# EAGLE board Q-FlexOLED-2 (EAGLE 7.7.0)
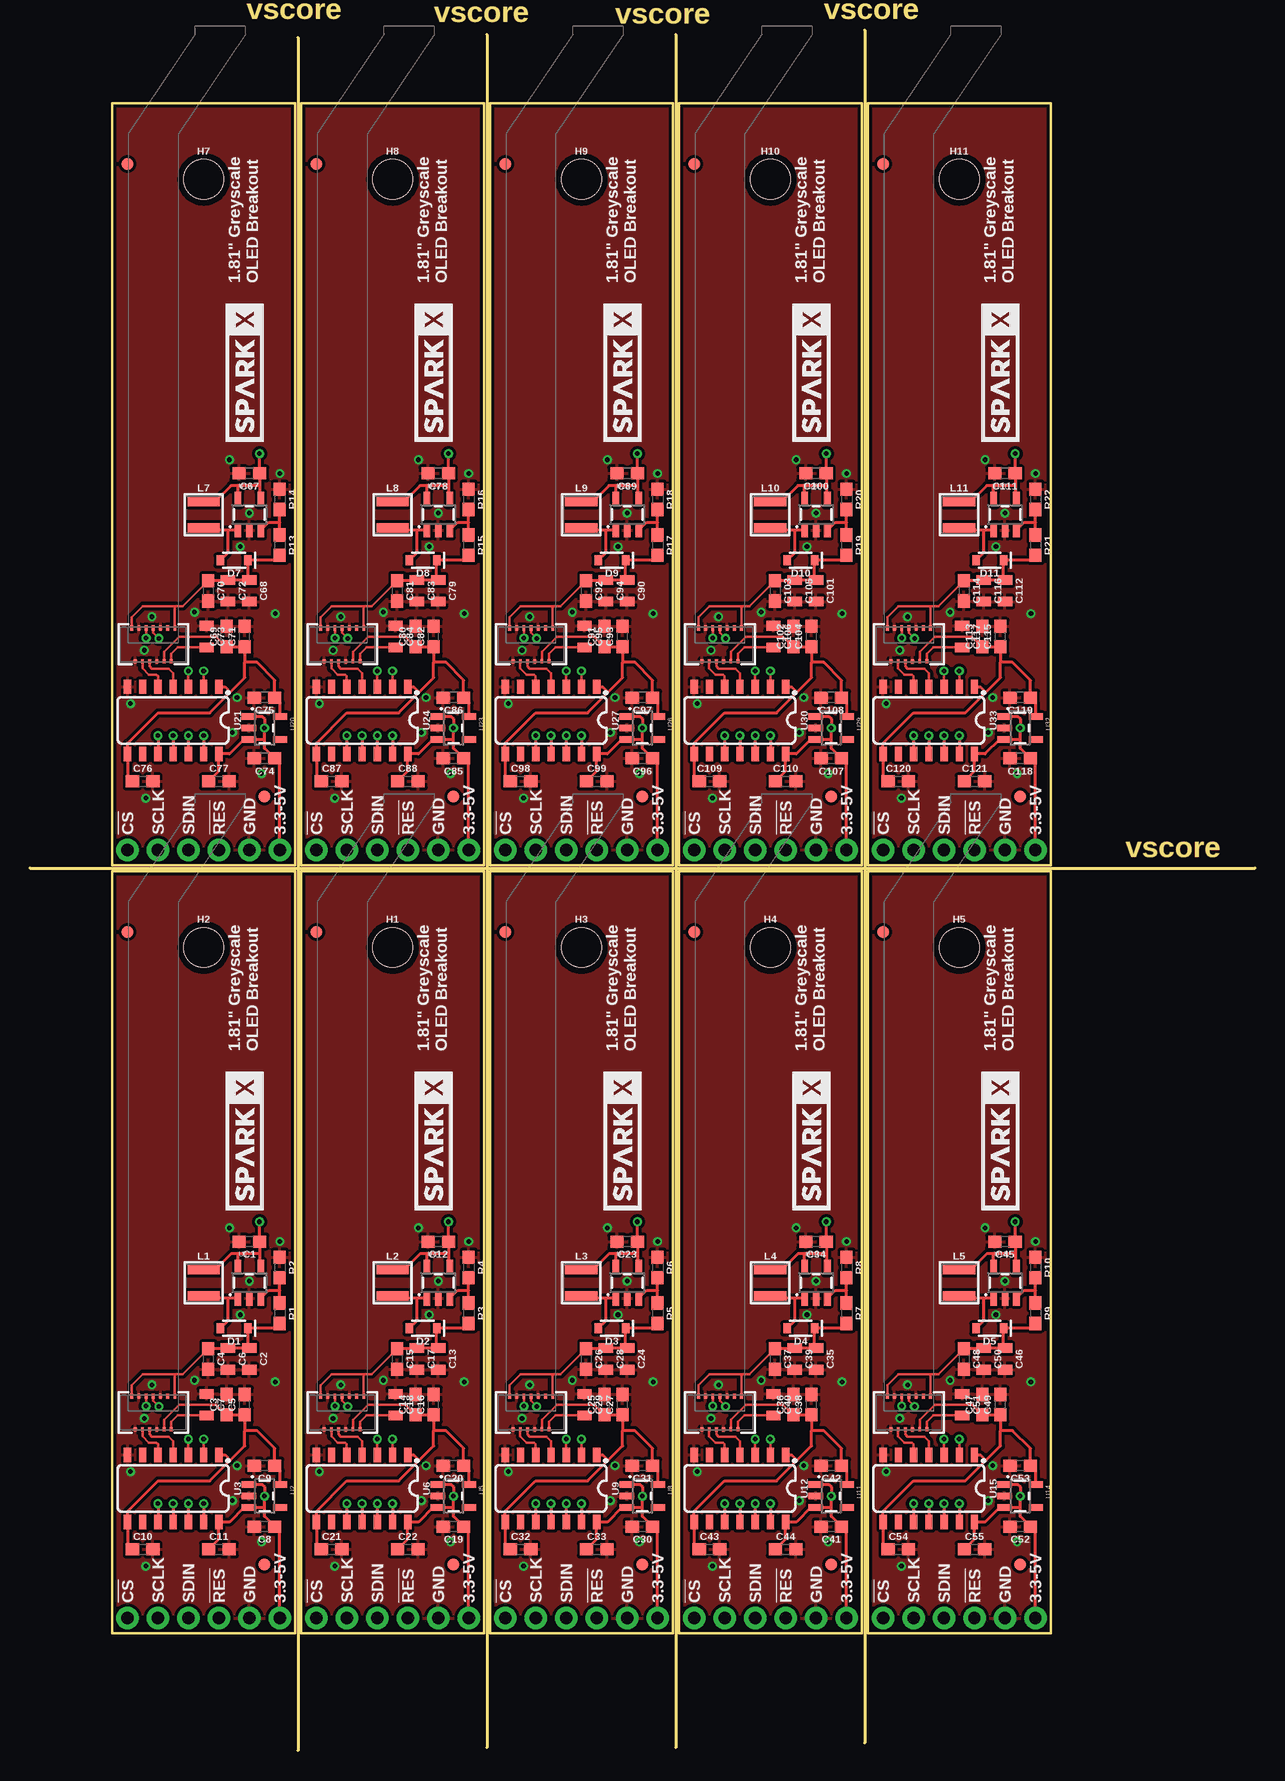
[diagram p0: board, top side]
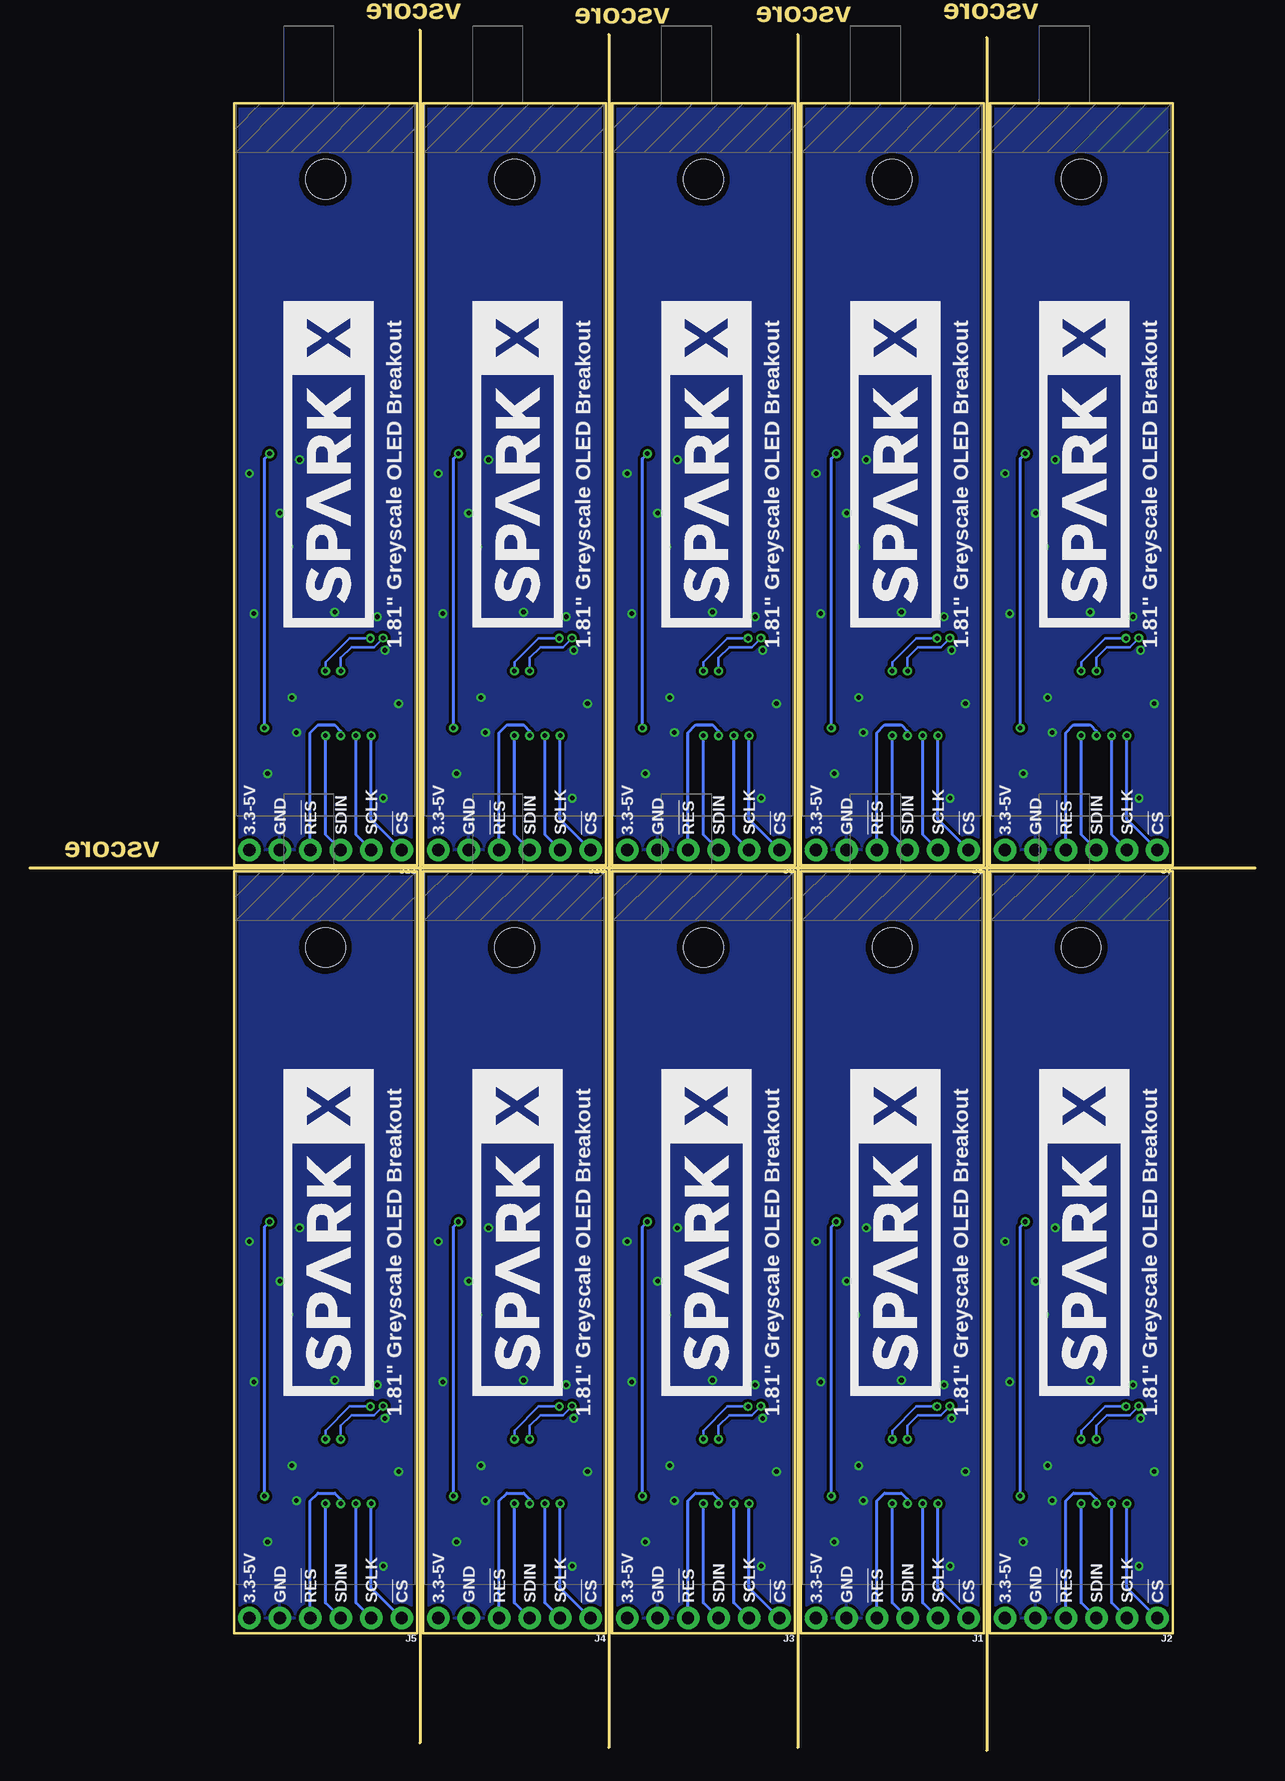
[diagram p1: board, bottom side, seen from below]

Size 102.11 x 143.38 mm. Coordinates in mm from the lower left corner, seen from the top.
Outline: 0,73.53 102.11,73.53
Outline: 22.35,142.75 22.35,0
Outline: 38.1,143 38.1,0.25
Outline: 53.85,143 53.85,0.25
Outline: 69.6,143.38 69.6,0.63
Outline: 22.1,9.78 6.86,9.78 6.86,73.28 22.1,73.27 22.1,9.78
Outline: 37.85,9.78 22.61,9.78 22.61,73.28 37.85,73.27 37.85,9.78
Outline: 53.59,9.78 38.35,9.78 38.35,73.28 53.59,73.27 53.59,9.78
Outline: 69.34,9.78 54.1,9.78 54.1,73.28 69.34,73.27 69.34,9.78
Outline: 85.09,9.78 69.85,9.78 69.85,73.28 85.09,73.27 85.09,9.78
Outline: 22.1,73.79 6.86,73.79 6.86,137.29 22.1,137.28 22.1,73.79
Outline: 37.85,73.79 22.61,73.79 22.61,137.29 37.85,137.28 37.85,73.79
Outline: 53.59,73.79 38.35,73.79 38.35,137.29 53.59,137.28 53.59,73.79
Outline: 69.34,73.79 54.1,73.79 54.1,137.29 69.34,137.28 69.34,73.79
Outline: 85.09,73.79 69.85,73.79 69.85,137.29 85.09,137.28 85.09,73.79
Copper layers (1*16): Top 0.035mm / dielectric 1.5mm / Bottom 0.035mm
Design rules "SparkFun-2-layer-TIGHT": minimum track width 7mil, minimum drill 15mil, track to track 7mil, track to pad 7mil, pad to pad 7mil, via to via 7mil, smd to smd 7mil, copper to edge 7mil, drill to drill 7mil, minimum pad ring 7mil, minimum via ring 7mil, stop-mask expansion 4mil, vias tented up to drill 25mil, thermal gap 10mil

## Footprints (pad centres in the part's own frame; a part is rotated, then mirrored left to right if it is on the bottom)
0603 = smd 1.1 x 1: 1 -0.85,0; 2 0.85,0
0805 = smd 0.8 x 1.2: 1 -0.9,0; 2 0.9,0
SOD-323 = smd 0.63 x 0.83: A 1.15,0; C -1.15,0
OEL_1.8_FPC_Y3B = smd 0.23 x 0.44 bottom: 1 6,-11.995; 3 5.4,-11.995; 5 4.8,-11.995; 7 4.2,-11.995; 9 3.6,-11.995; 11 3,-11.995; 13 2.4,-11.995 | smd 0.23 x 0.34 bottom: 2 5.7,-14.755; 4 5.1,-14.755; 6 4.5,-14.755; 8 3.9,-14.755; 10 3.3,-14.755; 12 2.7,-14.755
FIDUCIAL-1X2 = smd 1 x 1: 1 0,0
STAND-OFF = hole 3.302: 0,0
1X06_NO_SILK = drill 1.016 pad 1.88: 1 0,0; 2 2.54,0; 3 5.08,0; 4 7.62,0; 5 10.16,0; 6 12.7,0
INDUCTOR_3X3 = smd 2.7 x 0.8: P$1 0,1.1; P$2 0,-1.1
SOT23-5 = smd 0.55 x 1.2: 1 -0.95,-1.3; 2 0,-1.3; 3 0.95,-1.3; 4 0.95,1.3; 5 -0.95,1.3
SO14 = smd 0.6 x 1.2: 1 -3.81,-2.8; 2 -2.54,-2.8; 3 -1.27,-2.8; 4 0,-2.8; 5 1.27,-2.8; 6 2.54,-2.8; 7 3.81,-2.8; 8 3.81,2.8; 9 2.54,2.8; 10 1.27,2.8; 11 0,2.8; 12 -1.27,2.8; 13 -2.54,2.8; 14 -3.81,2.8

## Placement (x,y rotation side)
C1  1.0uF  [0603]  18.29,42.42 180 top
C2  1.0uF  [0805]  18.29,32.64 270 top
C3  0.1uF  [0603]  16.38,28.83 90 top
C4  0.1uF  [0603]  14.86,32.64 270 top
C5  1.0uF  [0603]  17.91,28.83 90 top
C6  2.2uF  [0805]  16.51,32.64 270 top
C7  2.2uF  [0805]  14.73,28.83 270 top
C8  1.0uF  [0603]  19.56,18.67 180 top
C9  2.2uF  [0603]  19.56,23.75 180 top
C10  0.1uF  [0603]  9.4,16.76 0 top
C11  0.1uF  [0603]  15.75,16.76 0 top
C12  1.0uF  [0603]  34.04,42.42 180 top
C13  1.0uF  [0805]  34.04,32.64 270 top
C14  0.1uF  [0603]  32.13,28.83 90 top
C15  0.1uF  [0603]  30.61,32.64 270 top
C16  1.0uF  [0603]  33.66,28.83 90 top
C17  2.2uF  [0805]  32.26,32.64 270 top
C18  2.2uF  [0805]  30.48,28.83 270 top
C19  1.0uF  [0603]  35.31,18.67 180 top
C20  2.2uF  [0603]  35.31,23.75 180 top
C21  0.1uF  [0603]  25.15,16.76 0 top
C22  0.1uF  [0603]  31.5,16.76 0 top
C23  1.0uF  [0603]  49.78,42.42 180 top
C24  1.0uF  [0805]  49.78,32.64 270 top
C25  0.1uF  [0603]  47.88,28.83 90 top
C26  0.1uF  [0603]  46.35,32.64 270 top
C27  1.0uF  [0603]  49.4,28.83 90 top
C28  2.2uF  [0805]  48.01,32.64 270 top
C29  2.2uF  [0805]  46.23,28.83 270 top
C30  1.0uF  [0603]  51.05,18.67 180 top
C31  2.2uF  [0603]  51.05,23.75 180 top
C32  0.1uF  [0603]  40.89,16.76 0 top
C33  0.1uF  [0603]  47.24,16.76 0 top
C34  1.0uF  [0603]  65.53,42.42 180 top
C35  1.0uF  [0805]  65.53,32.64 270 top
C36  0.1uF  [0603]  63.63,28.83 90 top
C37  0.1uF  [0603]  62.1,32.64 270 top
C38  1.0uF  [0603]  65.15,28.83 90 top
C39  2.2uF  [0805]  63.75,32.64 270 top
C40  2.2uF  [0805]  61.98,28.83 270 top
C41  1.0uF  [0603]  66.8,18.67 180 top
C42  2.2uF  [0603]  66.8,23.75 180 top
C43  0.1uF  [0603]  56.64,16.76 0 top
C44  0.1uF  [0603]  62.99,16.76 0 top
C45  1.0uF  [0603]  81.28,42.42 180 top
C46  1.0uF  [0805]  81.28,32.64 270 top
C47  0.1uF  [0603]  79.38,28.83 90 top
C48  0.1uF  [0603]  77.85,32.64 270 top
C49  1.0uF  [0603]  80.9,28.83 90 top
C50  2.2uF  [0805]  79.5,32.64 270 top
C51  2.2uF  [0805]  77.72,28.83 270 top
C52  1.0uF  [0603]  82.55,18.67 180 top
C53  2.2uF  [0603]  82.55,23.75 180 top
C54  0.1uF  [0603]  72.39,16.76 0 top
C55  0.1uF  [0603]  78.74,16.76 0 top
C67  1.0uF  [0603]  18.29,106.43 180 top
C68  1.0uF  [0805]  18.29,96.65 270 top
C69  0.1uF  [0603]  16.38,92.84 90 top
C70  0.1uF  [0603]  14.86,96.65 270 top
C71  1.0uF  [0603]  17.91,92.84 90 top
C72  2.2uF  [0805]  16.51,96.65 270 top
C73  2.2uF  [0805]  14.73,92.84 270 top
C74  1.0uF  [0603]  19.56,82.68 180 top
C75  2.2uF  [0603]  19.56,87.76 180 top
C76  0.1uF  [0603]  9.4,80.77 0 top
C77  0.1uF  [0603]  15.75,80.77 0 top
C78  1.0uF  [0603]  34.04,106.43 180 top
C79  1.0uF  [0805]  34.04,96.65 270 top
C80  0.1uF  [0603]  32.13,92.84 90 top
C81  0.1uF  [0603]  30.61,96.65 270 top
C82  1.0uF  [0603]  33.66,92.84 90 top
C83  2.2uF  [0805]  32.26,96.65 270 top
C84  2.2uF  [0805]  30.48,92.84 270 top
C85  1.0uF  [0603]  35.31,82.68 180 top
C86  2.2uF  [0603]  35.31,87.76 180 top
C87  0.1uF  [0603]  25.15,80.77 0 top
C88  0.1uF  [0603]  31.5,80.77 0 top
C89  1.0uF  [0603]  49.78,106.43 180 top
C90  1.0uF  [0805]  49.78,96.65 270 top
C91  0.1uF  [0603]  47.88,92.84 90 top
C92  0.1uF  [0603]  46.35,96.65 270 top
C93  1.0uF  [0603]  49.4,92.84 90 top
C94  2.2uF  [0805]  48.01,96.65 270 top
C95  2.2uF  [0805]  46.23,92.84 270 top
C96  1.0uF  [0603]  51.05,82.68 180 top
C97  2.2uF  [0603]  51.05,87.76 180 top
C98  0.1uF  [0603]  40.89,80.77 0 top
C99  0.1uF  [0603]  47.24,80.77 0 top
C100  1.0uF  [0603]  65.53,106.43 180 top
C101  1.0uF  [0805]  65.53,96.65 270 top
C102  0.1uF  [0603]  63.63,92.84 90 top
C103  0.1uF  [0603]  62.1,96.65 270 top
C104  1.0uF  [0603]  65.15,92.84 90 top
C105  2.2uF  [0805]  63.75,96.65 270 top
C106  2.2uF  [0805]  61.98,92.84 270 top
C107  1.0uF  [0603]  66.8,82.68 180 top
C108  2.2uF  [0603]  66.8,87.76 180 top
C109  0.1uF  [0603]  56.64,80.77 0 top
C110  0.1uF  [0603]  62.99,80.77 0 top
C111  1.0uF  [0603]  81.28,106.43 180 top
C112  1.0uF  [0805]  81.28,96.65 270 top
C113  0.1uF  [0603]  79.38,92.84 90 top
C114  0.1uF  [0603]  77.85,96.65 270 top
C115  1.0uF  [0603]  80.9,92.84 90 top
C116  2.2uF  [0805]  79.5,96.65 270 top
C117  2.2uF  [0805]  77.72,92.84 270 top
C118  1.0uF  [0603]  82.55,82.68 180 top
C119  2.2uF  [0603]  82.55,87.76 180 top
C120  0.1uF  [0603]  72.39,80.77 0 top
C121  0.1uF  [0603]  78.74,80.77 0 top
D1  1A/23V/620mV  [SOD-323]  17.02,35.18 180 top
D2  1A/23V/620mV  [SOD-323]  32.77,35.18 180 top
D3  1A/23V/620mV  [SOD-323]  48.51,35.18 180 top
D4  1A/23V/620mV  [SOD-323]  64.26,35.18 180 top
D5  1A/23V/620mV  [SOD-323]  80.01,35.18 180 top
D7  1A/23V/620mV  [SOD-323]  17.02,99.19 180 top
D8  1A/23V/620mV  [SOD-323]  32.77,99.19 180 top
D9  1A/23V/620mV  [SOD-323]  48.51,99.19 180 top
D10  1A/23V/620mV  [SOD-323]  64.26,99.19 180 top
D11  1A/23V/620mV  [SOD-323]  80.01,99.19 180 top
DS1  OEL_1.8OEL_Y3B  [OEL_1.8_FPC_Y3B]  14.48,41.53 0 bottom
DS2  OEL_1.8OEL_Y3B  [OEL_1.8_FPC_Y3B]  30.23,41.53 0 bottom
DS3  OEL_1.8OEL_Y3B  [OEL_1.8_FPC_Y3B]  45.97,41.53 0 bottom
DS4  OEL_1.8OEL_Y3B  [OEL_1.8_FPC_Y3B]  61.72,41.53 0 bottom
DS5  OEL_1.8OEL_Y3B  [OEL_1.8_FPC_Y3B]  77.47,41.53 0 bottom
DS7  OEL_1.8OEL_Y3B  [OEL_1.8_FPC_Y3B]  14.48,105.54 0 bottom
DS8  OEL_1.8OEL_Y3B  [OEL_1.8_FPC_Y3B]  30.23,105.54 0 bottom
DS9  OEL_1.8OEL_Y3B  [OEL_1.8_FPC_Y3B]  45.97,105.54 0 bottom
DS10  OEL_1.8OEL_Y3B  [OEL_1.8_FPC_Y3B]  61.72,105.54 0 bottom
DS11  OEL_1.8OEL_Y3B  [OEL_1.8_FPC_Y3B]  77.47,105.54 0 bottom
FD1  FIDUCIAL1X2  [FIDUCIAL-1X2]  19.56,15.49 0 top
FD2  FIDUCIAL1X2  [FIDUCIAL-1X2]  8.13,68.2 0 top
FD3  FIDUCIAL1X2  [FIDUCIAL-1X2]  35.31,15.49 0 top
FD4  FIDUCIAL1X2  [FIDUCIAL-1X2]  23.88,68.2 0 top
FD5  FIDUCIAL1X2  [FIDUCIAL-1X2]  51.05,15.49 0 top
FD6  FIDUCIAL1X2  [FIDUCIAL-1X2]  39.62,68.2 0 top
FD7  FIDUCIAL1X2  [FIDUCIAL-1X2]  66.8,15.49 0 top
FD8  FIDUCIAL1X2  [FIDUCIAL-1X2]  55.37,68.2 0 top
FD9  FIDUCIAL1X2  [FIDUCIAL-1X2]  82.55,15.49 0 top
FD10  FIDUCIAL1X2  [FIDUCIAL-1X2]  71.12,68.2 0 top
FD13  FIDUCIAL1X2  [FIDUCIAL-1X2]  19.56,79.5 0 top
FD14  FIDUCIAL1X2  [FIDUCIAL-1X2]  8.13,132.21 0 top
FD15  FIDUCIAL1X2  [FIDUCIAL-1X2]  35.31,79.5 0 top
FD16  FIDUCIAL1X2  [FIDUCIAL-1X2]  23.88,132.21 0 top
FD17  FIDUCIAL1X2  [FIDUCIAL-1X2]  51.05,79.5 0 top
FD18  FIDUCIAL1X2  [FIDUCIAL-1X2]  39.62,132.21 0 top
FD19  FIDUCIAL1X2  [FIDUCIAL-1X2]  66.8,79.5 0 top
FD20  FIDUCIAL1X2  [FIDUCIAL-1X2]  55.37,132.21 0 top
FD21  FIDUCIAL1X2  [FIDUCIAL-1X2]  82.55,79.5 0 top
FD22  FIDUCIAL1X2  [FIDUCIAL-1X2]  71.12,132.21 0 top
H1  STAND-OFF  [STAND-OFF]  30.23,66.93 0 top
H2  STAND-OFF  [STAND-OFF]  14.48,66.93 0 top
H3  STAND-OFF  [STAND-OFF]  45.97,66.93 0 top
H4  STAND-OFF  [STAND-OFF]  61.72,66.93 0 top
H5  STAND-OFF  [STAND-OFF]  77.47,66.93 0 top
H7  STAND-OFF  [STAND-OFF]  14.48,130.94 0 top
H8  STAND-OFF  [STAND-OFF]  30.23,130.94 0 top
H9  STAND-OFF  [STAND-OFF]  45.97,130.94 0 top
H10  STAND-OFF  [STAND-OFF]  61.72,130.94 0 top
H11  STAND-OFF  [STAND-OFF]  77.47,130.94 0 top
J1  [1X06_NO_SILK]  23.88,11.05 180 bottom
J2  [1X06_NO_SILK]  8.13,11.05 180 bottom
J3  [1X06_NO_SILK]  39.62,11.05 180 bottom
J4  [1X06_NO_SILK]  55.37,11.05 180 bottom
J5  [1X06_NO_SILK]  71.12,11.05 180 bottom
J7  [1X06_NO_SILK]  8.13,75.06 180 bottom
J8  [1X06_NO_SILK]  23.88,75.06 180 bottom
J9  [1X06_NO_SILK]  39.62,75.06 180 bottom
J10  [1X06_NO_SILK]  55.37,75.06 180 bottom
J11  [1X06_NO_SILK]  71.12,75.06 180 bottom
L1  10uH  [INDUCTOR_3X3]  14.48,38.99 0 top
L2  10uH  [INDUCTOR_3X3]  30.23,38.99 0 top
L3  10uH  [INDUCTOR_3X3]  45.97,38.99 0 top
L4  10uH  [INDUCTOR_3X3]  61.72,38.99 0 top
L5  10uH  [INDUCTOR_3X3]  77.47,38.99 0 top
L7  10uH  [INDUCTOR_3X3]  14.48,103 0 top
L8  10uH  [INDUCTOR_3X3]  30.23,103 0 top
L9  10uH  [INDUCTOR_3X3]  45.97,103 0 top
L10  10uH  [INDUCTOR_3X3]  61.72,103 0 top
L11  10uH  [INDUCTOR_3X3]  77.47,103 0 top
LOGO1  SPARKX-LOGO5  [SPARKX-LARGE]  17.91,50.8 90 top
LOGO2  SPARKX-LOGO5  [SPARKX-XLARGE]  14.22,43.18 90 bottom
LOGO3  SPARKX-LOGO5  [SPARKX-LARGE]  33.66,50.8 90 top
LOGO4  SPARKX-LOGO5  [SPARKX-XLARGE]  29.97,43.18 90 bottom
LOGO5  SPARKX-LOGO5  [SPARKX-LARGE]  49.4,50.8 90 top
LOGO6  SPARKX-LOGO5  [SPARKX-XLARGE]  45.72,43.18 90 bottom
LOGO7  SPARKX-LOGO5  [SPARKX-LARGE]  65.15,50.8 90 top
LOGO8  SPARKX-LOGO5  [SPARKX-XLARGE]  61.47,43.18 90 bottom
LOGO9  SPARKX-LOGO5  [SPARKX-LARGE]  80.9,50.8 90 top
LOGO10  SPARKX-LOGO5  [SPARKX-XLARGE]  77.22,43.18 90 bottom
LOGO13  SPARKX-LOGO5  [SPARKX-LARGE]  17.91,114.81 90 top
LOGO14  SPARKX-LOGO5  [SPARKX-XLARGE]  14.22,107.19 90 bottom
LOGO15  SPARKX-LOGO5  [SPARKX-LARGE]  33.66,114.81 90 top
LOGO16  SPARKX-LOGO5  [SPARKX-XLARGE]  29.97,107.19 90 bottom
LOGO17  SPARKX-LOGO5  [SPARKX-LARGE]  49.4,114.81 90 top
LOGO18  SPARKX-LOGO5  [SPARKX-XLARGE]  45.72,107.19 90 bottom
LOGO19  SPARKX-LOGO5  [SPARKX-LARGE]  65.15,114.81 90 top
LOGO20  SPARKX-LOGO5  [SPARKX-XLARGE]  61.47,107.19 90 bottom
LOGO21  SPARKX-LOGO5  [SPARKX-LARGE]  80.9,114.81 90 top
LOGO22  SPARKX-LOGO5  [SPARKX-XLARGE]  77.22,107.19 90 bottom
R1  47k  [0603]  20.83,36.45 270 top
R2  5.6k  [0603]  20.83,40.26 270 top
R3  47k  [0603]  36.58,36.45 270 top
R4  5.6k  [0603]  36.58,40.26 270 top
R5  47k  [0603]  52.32,36.45 270 top
R6  5.6k  [0603]  52.32,40.26 270 top
R7  47k  [0603]  68.07,36.45 270 top
R8  5.6k  [0603]  68.07,40.26 270 top
R9  47k  [0603]  83.82,36.45 270 top
R10  5.6k  [0603]  83.82,40.26 270 top
R13  47k  [0603]  20.83,100.46 270 top
R14  5.6k  [0603]  20.83,104.27 270 top
R15  47k  [0603]  36.58,100.46 270 top
R16  5.6k  [0603]  36.58,104.27 270 top
R17  47k  [0603]  52.32,100.46 270 top
R18  5.6k  [0603]  52.32,104.27 270 top
R19  47k  [0603]  68.07,100.46 270 top
R20  5.6k  [0603]  68.07,104.27 270 top
R21  47k  [0603]  83.82,100.46 270 top
R22  5.6k  [0603]  83.82,104.27 270 top
U1  AP3012  [SOT23-5]  18.29,38.99 0 top
U2  3.3V  [SOT23-5]  19.56,21.21 270 top
U3  TXB0104  [SO14]  11.94,21.84 180 top
U4  AP3012  [SOT23-5]  34.04,38.99 0 top
U5  3.3V  [SOT23-5]  35.31,21.21 270 top
U6  TXB0104  [SO14]  27.69,21.84 180 top
U7  AP3012  [SOT23-5]  49.78,38.99 0 top
U8  3.3V  [SOT23-5]  51.05,21.21 270 top
U9  TXB0104  [SO14]  43.43,21.84 180 top
U10  AP3012  [SOT23-5]  65.53,38.99 0 top
U11  3.3V  [SOT23-5]  66.8,21.21 270 top
U12  TXB0104  [SO14]  59.18,21.84 180 top
U13  AP3012  [SOT23-5]  81.28,38.99 0 top
U14  3.3V  [SOT23-5]  82.55,21.21 270 top
U15  TXB0104  [SO14]  74.93,21.84 180 top
U19  AP3012  [SOT23-5]  18.29,103 0 top
U20  3.3V  [SOT23-5]  19.56,85.22 270 top
U21  TXB0104  [SO14]  11.94,85.85 180 top
U22  AP3012  [SOT23-5]  34.04,103 0 top
U23  3.3V  [SOT23-5]  35.31,85.22 270 top
U24  TXB0104  [SO14]  27.69,85.85 180 top
U25  AP3012  [SOT23-5]  49.78,103 0 top
U26  3.3V  [SOT23-5]  51.05,85.22 270 top
U27  TXB0104  [SO14]  43.43,85.85 180 top
U28  AP3012  [SOT23-5]  65.53,103 0 top
U29  3.3V  [SOT23-5]  66.8,85.22 270 top
U30  TXB0104  [SO14]  59.18,85.85 180 top
U31  AP3012  [SOT23-5]  81.28,103 0 top
U32  3.3V  [SOT23-5]  82.55,85.22 270 top
U33  TXB0104  [SO14]  74.93,85.85 180 top

## Library data of the parts
C1 C5 C8 C12 C16 C19 C23 C27 C30 C34 C38 C41 C45 C49 C52 C67 C71 C74 C78 C82 C85 C89 C93 C96 C100 C104 C107 C111 C115 C118 = SparkFun-Capacitors; PROD_ID: CAP-00868
C2 C13 C24 C35 C46 C68 C79 C90 C101 C112 = SparkFun-Capacitors; PROD_ID: CAP-11625
C3 C4 C10 C11 C14 C15 C21 C22 C25 C26 C32 C33 C36 C37 C43 C44 C47 C48 C54 C55 C69 C70 C76 C77 C80 C81 C87 C88 C91 C92 C98 C99 C102 C103 C109 C110 C113 C114 C120 C121 = SparkFun-Capacitors; PROD_ID: CAP-00810
C6 C7 C17 C18 C28 C29 C39 C40 C50 C51 C72 C73 C83 C84 C94 C95 C105 C106 C116 C117 = SparkFun-Capacitors; PROD_ID: CAP-11624
C9 C20 C31 C42 C53 C75 C86 C97 C108 C119 = SparkFun-Capacitors; PROD_ID: CAP-07888
D1-D5 D7-D11 = SparkFun-DiscreteSemi; PROD_ID: DIO-11623
DS1-DS5 DS7-DS11 L1-L5 L7-L11 LOGO1-LOGO10 LOGO13-LOGO22 U1 U4 U7 U10 U13 U19 U22 U25 U28 U31 = 1.81_Greyscale_OLED_Breakout
FD1-FD10 FD13-FD22 = SparkFun-Aesthetics
H1-H5 H7-H11 = SparkFun-Hardware
J1-J5 J7-J11 = SparkFun-Connectors
R1 R3 R5 R7 R9 R13 R15 R17 R19 R21 = SparkFun-Resistors; PROD_ID: RES-07871
R2 R4 R6 R8 R10 R14 R16 R18 R20 R22 = SparkFun-Resistors; PROD_ID: RES-12378
U2 U5 U8 U11 U14 U20 U23 U26 U29 U32 = SparkFun-IC-Power; PROD_ID: VREG-12457
U3 U6 U9 U12 U15 U21 U24 U27 U30 U33 = SparkFun-IC-Comms; PROD_ID: IC-11329

## Nets
3.3V: C3.1 C5.1 C9.1 C10.1 DS1.10 U2.5 U3.1 U3.8
3.3V1: C14.1 C16.1 C20.1 C21.1 DS2.10 U5.5 U6.1 U6.8
3.3V2: C25.1 C27.1 C31.1 C32.1 DS3.10 U8.5 U9.1 U9.8
3.3V3: C36.1 C38.1 C42.1 C43.1 DS4.10 U11.5 U12.1 U12.8
3.3V4: C47.1 C49.1 C53.1 C54.1 DS5.10 U14.5 U15.1 U15.8
3.3V6: C69.1 C71.1 C75.1 C76.1 DS7.10 U20.5 U21.1 U21.8
3.3V7: C80.1 C82.1 C86.1 C87.1 DS8.10 U23.5 U24.1 U24.8
3.3V8: C91.1 C93.1 C97.1 C98.1 DS9.10 U26.5 U27.1 U27.8
3.3V9: C102.1 C104.1 C108.1 C109.1 DS10.10 U29.5 U30.1 U30.8
3.3V10: C113.1 C115.1 C119.1 C120.1 DS11.10 U32.5 U33.1 U33.8
12V: C2.1 C4.1 C6.1 D1.C DS1.1 DS1.13 R1.2
12V1: C13.1 C15.1 C17.1 D2.C DS2.1 DS2.13 R3.2
12V2: C24.1 C26.1 C28.1 D3.C DS3.1 DS3.13 R5.2
12V3: C35.1 C37.1 C39.1 D4.C DS4.1 DS4.13 R7.2
12V4: C46.1 C48.1 C50.1 D5.C DS5.1 DS5.13 R9.2
12V6: C68.1 C70.1 C72.1 D7.C DS7.1 DS7.13 R13.2
12V7: C79.1 C81.1 C83.1 D8.C DS8.1 DS8.13 R15.2
12V8: C90.1 C92.1 C94.1 D9.C DS9.1 DS9.13 R17.2
12V9: C101.1 C103.1 C105.1 D10.C DS10.1 DS10.13 R19.2
12V10: C112.1 C114.1 C116.1 D11.C DS11.1 DS11.13 R21.2
!CS!: DS1.4 U3.5
!CS!1: DS2.4 U6.5
!CS!2: DS3.4 U9.5
!CS!3: DS4.4 U12.5
!CS!4: DS5.4 U15.5
!CS!6: DS7.4 U21.5
!CS!7: DS8.4 U24.5
!CS!8: DS9.4 U27.5
!CS!9: DS10.4 U30.5
!CS!10: DS11.4 U33.5
!CS!_HIGH: J2.1 U3.10
!CS!_HIGH1: J1.1 U6.10
!CS!_HIGH2: J3.1 U9.10
!CS!_HIGH3: J4.1 U12.10
!CS!_HIGH4: J5.1 U15.10
!CS!_HIGH6: J7.1 U21.10
!CS!_HIGH7: J8.1 U24.10
!CS!_HIGH8: J9.1 U27.10
!CS!_HIGH9: J10.1 U30.10
!CS!_HIGH10: J11.1 U33.10
!RES!: DS1.5 U3.3
!RES!1: DS2.5 U6.3
!RES!2: DS3.5 U9.3
!RES!3: DS4.5 U12.3
!RES!4: DS5.5 U15.3
!RES!6: DS7.5 U21.3
!RES!7: DS8.5 U24.3
!RES!8: DS9.5 U27.3
!RES!9: DS10.5 U30.3
!RES!10: DS11.5 U33.3
!RES!_HIGH: J2.4 U3.12
!RES!_HIGH1: J1.4 U6.12
!RES!_HIGH2: J3.4 U9.12
!RES!_HIGH3: J4.4 U12.12
!RES!_HIGH4: J5.4 U15.12
!RES!_HIGH6: J7.4 U21.12
!RES!_HIGH7: J8.4 U24.12
!RES!_HIGH8: J9.4 U27.12
!RES!_HIGH9: J10.4 U30.12
!RES!_HIGH10: J11.4 U33.12
GND: C1.2 C2.2 C3.2 C4.2 C5.2 C6.2 C7.1 C8.2 C9.2 C10.2 C11.2 DS1.2 DS1.3 DS1.8 DS1.9 J2.5 R2.1 U1.2 U2.2 U3.7
GND1: C12.2 C13.2 C14.2 C15.2 C16.2 C17.2 C18.1 C19.2 C20.2 C21.2 C22.2 DS2.2 DS2.3 DS2.8 DS2.9 J1.5 R4.1 U4.2 U5.2 U6.7
GND2: C23.2 C24.2 C25.2 C26.2 C27.2 C28.2 C29.1 C30.2 C31.2 C32.2 C33.2 DS3.2 DS3.3 DS3.8 DS3.9 J3.5 R6.1 U7.2 U8.2 U9.7
GND3: C34.2 C35.2 C36.2 C37.2 C38.2 C39.2 C40.1 C41.2 C42.2 C43.2 C44.2 DS4.2 DS4.3 DS4.8 DS4.9 J4.5 R8.1 U10.2 U11.2 U12.7
GND4: C45.2 C46.2 C47.2 C48.2 C49.2 C50.2 C51.1 C52.2 C53.2 C54.2 C55.2 DS5.2 DS5.3 DS5.8 DS5.9 J5.5 R10.1 U13.2 U14.2 U15.7
GND6: C67.2 C68.2 C69.2 C70.2 C71.2 C72.2 C73.1 C74.2 C75.2 C76.2 C77.2 DS7.2 DS7.3 DS7.8 DS7.9 J7.5 R14.1 U19.2 U20.2 U21.7
GND7: C78.2 C79.2 C80.2 C81.2 C82.2 C83.2 C84.1 C85.2 C86.2 C87.2 C88.2 DS8.2 DS8.3 DS8.8 DS8.9 J8.5 R16.1 U22.2 U23.2 U24.7
GND8: C89.2 C90.2 C91.2 C92.2 C93.2 C94.2 C95.1 C96.2 C97.2 C98.2 C99.2 DS9.2 DS9.3 DS9.8 DS9.9 J9.5 R18.1 U25.2 U26.2 U27.7
GND9: C100.2 C101.2 C102.2 C103.2 C104.2 C105.2 C106.1 C107.2 C108.2 C109.2 C110.2 DS10.2 DS10.3 DS10.8 DS10.9 J10.5 R20.1 U28.2 U29.2 U30.7
GND10: C111.2 C112.2 C113.2 C114.2 C115.2 C116.2 C117.1 C118.2 C119.2 C120.2 C121.2 DS11.2 DS11.3 DS11.8 DS11.9 J11.5 R22.1 U31.2 U32.2 U33.7
N$1: C7.2 DS1.12
N$2: D1.A L1.P$2 U1.1
N$3: R1.1 R2.2 U1.3
N$4: D2.A L2.P$2 U4.1
N$5: R3.1 R4.2 U4.3
N$6: C18.2 DS2.12
N$7: D3.A L3.P$2 U7.1
N$8: R5.1 R6.2 U7.3
N$9: C29.2 DS3.12
N$10: D4.A L4.P$2 U10.1
N$11: R7.1 R8.2 U10.3
N$12: C40.2 DS4.12
N$13: D5.A L5.P$2 U13.1
N$14: R9.1 R10.2 U13.3
N$15: C51.2 DS5.12
N$19: D7.A L7.P$2 U19.1
N$20: R13.1 R14.2 U19.3
N$21: C73.2 DS7.12
N$22: D8.A L8.P$2 U22.1
N$23: R15.1 R16.2 U22.3
N$24: C84.2 DS8.12
N$25: D9.A L9.P$2 U25.1
N$26: R17.1 R18.2 U25.3
N$27: C95.2 DS9.12
N$28: D10.A L10.P$2 U28.1
N$29: R19.1 R20.2 U28.3
N$30: C106.2 DS10.12
N$31: D11.A L11.P$2 U31.1
N$32: R21.1 R22.2 U31.3
N$33: C117.2 DS11.12
SCLK: DS1.6 U3.4
SCLK1: DS2.6 U6.4
SCLK2: DS3.6 U9.4
SCLK3: DS4.6 U12.4
SCLK4: DS5.6 U15.4
SCLK6: DS7.6 U21.4
SCLK7: DS8.6 U24.4
SCLK8: DS9.6 U27.4
SCLK9: DS10.6 U30.4
SCLK10: DS11.6 U33.4
SCLK_HIGH: J2.2 U3.11
SCLK_HIGH1: J1.2 U6.11
SCLK_HIGH2: J3.2 U9.11
SCLK_HIGH3: J4.2 U12.11
SCLK_HIGH4: J5.2 U15.11
SCLK_HIGH6: J7.2 U21.11
SCLK_HIGH7: J8.2 U24.11
SCLK_HIGH8: J9.2 U27.11
SCLK_HIGH9: J10.2 U30.11
SCLK_HIGH10: J11.2 U33.11
SDIN: DS1.7 U3.2
SDIN1: DS2.7 U6.2
SDIN2: DS3.7 U9.2
SDIN3: DS4.7 U12.2
SDIN4: DS5.7 U15.2
SDIN6: DS7.7 U21.2
SDIN7: DS8.7 U24.2
SDIN8: DS9.7 U27.2
SDIN9: DS10.7 U30.2
SDIN10: DS11.7 U33.2
SDIN_HIGH: J2.3 U3.13
SDIN_HIGH1: J1.3 U6.13
SDIN_HIGH2: J3.3 U9.13
SDIN_HIGH3: J4.3 U12.13
SDIN_HIGH4: J5.3 U15.13
SDIN_HIGH6: J7.3 U21.13
SDIN_HIGH7: J8.3 U24.13
SDIN_HIGH8: J9.3 U27.13
SDIN_HIGH9: J10.3 U30.13
SDIN_HIGH10: J11.3 U33.13
VIN: C1.1 C8.1 C11.1 J2.6 L1.P$1 U1.4 U1.5 U2.1 U2.3 U3.14
VIN1: C12.1 C19.1 C22.1 J1.6 L2.P$1 U4.4 U4.5 U5.1 U5.3 U6.14
VIN2: C23.1 C30.1 C33.1 J3.6 L3.P$1 U7.4 U7.5 U8.1 U8.3 U9.14
VIN3: C34.1 C41.1 C44.1 J4.6 L4.P$1 U10.4 U10.5 U11.1 U11.3 U12.14
VIN4: C45.1 C52.1 C55.1 J5.6 L5.P$1 U13.4 U13.5 U14.1 U14.3 U15.14
VIN6: C67.1 C74.1 C77.1 J7.6 L7.P$1 U19.4 U19.5 U20.1 U20.3 U21.14
VIN7: C78.1 C85.1 C88.1 J8.6 L8.P$1 U22.4 U22.5 U23.1 U23.3 U24.14
VIN8: C89.1 C96.1 C99.1 J9.6 L9.P$1 U25.4 U25.5 U26.1 U26.3 U27.14
VIN9: C100.1 C107.1 C110.1 J10.6 L10.P$1 U28.4 U28.5 U29.1 U29.3 U30.14
VIN10: C111.1 C118.1 C121.1 J11.6 L11.P$1 U31.4 U31.5 U32.1 U32.3 U33.14

## Tracks (layer width: path | path; a pad name or v marks a point on that pad's centre or on a via)
3.3V
  Top 0.229: DS1.10 11.18,27.56 12.45,28.83 15.53,28.83 C3.1
  Top 0.254: U2.5 20.86,23.3 C9.1 20.41,25.19 18.92,26.67 17.91,26.67 | 17.91,26.67 C5.1 C3.1 | C10.1 8.13,17.18 U3.8 8.13,19.94 10.67,22.48 14.99,22.48 16.7,24.19 | 16.7,24.19 17.91,25.4 17.91,26.67 | U3.1 16.25,24.64 16.7,24.19
3.3V1
  Top 0.229: DS2.10 26.93,27.56 28.19,28.83 31.28,28.83 C14.1
  Top 0.254: U5.5 36.61,23.3 C20.1 36.16,25.19 34.67,26.67 33.66,26.67 | 33.66,26.67 C16.1 C14.1 | C21.1 23.88,17.18 U6.8 23.88,19.94 26.42,22.48 30.73,22.48 32.45,24.19 | 32.45,24.19 33.66,25.4 33.66,26.67 | U6.1 32,24.64 32.45,24.19
3.3V2
  Top 0.229: DS3.10 42.67,27.56 43.94,28.83 47.03,28.83 C25.1
  Top 0.254: U8.5 52.35,23.3 C31.1 51.9,25.19 50.42,26.67 49.4,26.67 | 49.4,26.67 C27.1 C25.1 | C32.1 39.62,17.18 U9.8 39.62,19.94 42.16,22.48 46.48,22.48 48.2,24.19 | 48.2,24.19 49.4,25.4 49.4,26.67 | U9.1 47.75,24.64 48.2,24.19
3.3V3
  Top 0.229: DS4.10 58.42,27.56 59.69,28.83 62.78,28.83 C36.1
  Top 0.254: U11.5 68.1,23.3 C42.1 67.65,25.19 66.17,26.67 65.15,26.67 | 65.15,26.67 C38.1 C36.1 | C43.1 55.37,17.18 U12.8 55.37,19.94 57.91,22.48 62.23,22.48 63.95,24.19 | 63.95,24.19 65.15,25.4 65.15,26.67 | U12.1 63.49,24.64 63.95,24.19
3.3V4
  Top 0.229: DS5.10 74.17,27.56 75.44,28.83 78.53,28.83 C47.1
  Top 0.254: U14.5 83.85,23.3 C53.1 83.4,25.19 81.92,26.67 80.9,26.67 | 80.9,26.67 C49.1 C47.1 | C54.1 71.12,17.18 U15.8 71.12,19.94 73.66,22.48 77.98,22.48 79.69,24.19 | 79.69,24.19 80.9,25.4 80.9,26.67 | U15.1 79.24,24.64 79.69,24.19
3.3V6
  Top 0.229: DS7.10 11.18,91.57 12.45,92.84 15.53,92.84 C69.1
  Top 0.254: U20.5 20.86,87.31 C75.1 20.41,89.19 18.92,90.68 17.91,90.68 | 17.91,90.68 C71.1 C69.1 | C76.1 8.13,81.19 U21.8 8.13,83.95 10.67,86.49 14.99,86.49 16.7,88.2 | 16.7,88.2 17.91,89.41 17.91,90.68 | U21.1 16.25,88.65 16.7,88.2
3.3V7
  Top 0.229: DS8.10 26.93,91.57 28.19,92.84 31.28,92.84 C80.1
  Top 0.254: U23.5 36.61,87.31 C86.1 36.16,89.19 34.67,90.68 33.66,90.68 | 33.66,90.68 C82.1 C80.1 | C87.1 23.88,81.19 U24.8 23.88,83.95 26.42,86.49 30.73,86.49 32.45,88.2 | 32.45,88.2 33.66,89.41 33.66,90.68 | U24.1 32,88.65 32.45,88.2
3.3V8
  Top 0.229: DS9.10 42.67,91.57 43.94,92.84 47.03,92.84 C91.1
  Top 0.254: U26.5 52.35,87.31 C97.1 51.9,89.19 50.42,90.68 49.4,90.68 | 49.4,90.68 C93.1 C91.1 | C98.1 39.62,81.19 U27.8 39.62,83.95 42.16,86.49 46.48,86.49 48.2,88.2 | 48.2,88.2 49.4,89.41 49.4,90.68 | U27.1 47.75,88.65 48.2,88.2
3.3V9
  Top 0.229: DS10.10 58.42,91.57 59.69,92.84 62.78,92.84 C102.1
  Top 0.254: U29.5 68.1,87.31 C108.1 67.65,89.19 66.17,90.68 65.15,90.68 | 65.15,90.68 C104.1 C102.1 | C109.1 55.37,81.19 U30.8 55.37,83.95 57.91,86.49 62.23,86.49 63.95,88.2 | 63.95,88.2 65.15,89.41 65.15,90.68 | U30.1 63.49,88.65 63.95,88.2
3.3V10
  Top 0.229: DS11.10 74.17,91.57 75.44,92.84 78.53,92.84 C113.1
  Top 0.254: U32.5 83.85,87.31 C119.1 83.4,89.19 81.92,90.68 80.9,90.68 | 80.9,90.68 C115.1 C113.1 | C120.1 71.12,81.19 U33.8 71.12,83.95 73.66,86.49 77.98,86.49 79.69,88.2 | 79.69,88.2 80.9,89.41 80.9,90.68 | U33.1 79.24,88.65 79.69,88.2
12V
  Top 0.229: DS1.1 8.48,30.45 9.4,31.37 11.94,31.37 12.08,31.37 | C4.1 12.74,31.37 12.08,31.37 | DS1.13 12.08,31.37
  Top 0.254: R1.2 20.41,35.18 D1.C 18.17,33.66 C2.1 C6.1 16.46,33.49 C4.1
12V1
  Top 0.229: DS2.1 24.23,30.45 25.15,31.37 27.69,31.37 27.83,31.37 | C15.1 28.49,31.37 27.83,31.37 | DS2.13 27.83,31.37
  Top 0.254: R3.2 36.16,35.18 D2.C 33.92,33.66 C13.1 C17.1 32.21,33.49 C15.1
12V2
  Top 0.229: DS3.1 39.97,30.45 40.89,31.37 43.43,31.37 43.57,31.37 | C26.1 44.23,31.37 43.57,31.37 | DS3.13 43.57,31.37
  Top 0.254: R5.2 51.9,35.18 D3.C 49.66,33.66 C24.1 C28.1 47.96,33.49 C26.1
12V3
  Top 0.229: DS4.1 55.72,30.45 56.64,31.37 59.18,31.37 59.32,31.37 | C37.1 59.98,31.37 59.32,31.37 | DS4.13 59.32,31.37
  Top 0.254: R7.2 67.65,35.18 D4.C 65.41,33.66 C35.1 C39.1 63.7,33.49 C37.1
12V4
  Top 0.229: DS5.1 71.47,30.45 72.39,31.37 74.93,31.37 75.07,31.37 | C48.1 75.73,31.37 75.07,31.37 | DS5.13 75.07,31.37
  Top 0.254: R9.2 83.4,35.18 D5.C 81.16,33.66 C46.1 C50.1 79.45,33.49 C48.1
12V6
  Top 0.229: DS7.1 8.48,94.46 9.4,95.38 11.94,95.38 12.08,95.38 | C70.1 12.74,95.38 12.08,95.38 | DS7.13 12.08,95.38
  Top 0.254: R13.2 20.41,99.19 D7.C 18.17,97.67 C68.1 C72.1 16.46,97.5 C70.1
12V7
  Top 0.229: DS8.1 24.23,94.46 25.15,95.38 27.69,95.38 27.83,95.38 | C81.1 28.49,95.38 27.83,95.38 | DS8.13 27.83,95.38
  Top 0.254: R15.2 36.16,99.19 D8.C 33.92,97.67 C79.1 C83.1 32.21,97.5 C81.1
12V8
  Top 0.229: DS9.1 39.97,94.46 40.89,95.38 43.43,95.38 43.57,95.38 | C92.1 44.23,95.38 43.57,95.38 | DS9.13 43.57,95.38
  Top 0.254: R17.2 51.9,99.19 D9.C 49.66,97.67 C90.1 C94.1 47.96,97.5 C92.1
12V9
  Top 0.229: DS10.1 55.72,94.46 56.64,95.38 59.18,95.38 59.32,95.38 | C103.1 59.98,95.38 59.32,95.38 | DS10.13 59.32,95.38
  Top 0.254: R19.2 67.65,99.19 D10.C 65.41,97.67 C101.1 C105.1 63.7,97.5 C103.1
12V10
  Top 0.229: DS11.1 71.47,94.46 72.39,95.38 74.93,95.38 75.07,95.38 | C114.1 75.73,95.38 75.07,95.38 | DS11.13 75.07,95.38
  Top 0.254: R21.2 83.4,99.19 D11.C 81.16,97.67 C112.1 C116.1 79.45,97.5 C114.1
!CS!
  Top 0.229: DS1.4 9.38,26.18 9.91,25.65 10.54,25.65 10.67,25.53 U3.5
!CS!1
  Top 0.229: DS2.4 25.13,26.18 25.65,25.65 26.29,25.65 26.42,25.53 U6.5
!CS!2
  Top 0.229: DS3.4 40.87,26.18 41.4,25.65 42.04,25.65 42.16,25.53 U9.5
!CS!3
  Top 0.229: DS4.4 56.62,26.18 57.15,25.65 57.78,25.65 57.91,25.53 U12.5
!CS!4
  Top 0.229: DS5.4 72.37,26.18 72.9,25.65 73.53,25.65 73.66,25.53 U15.5
!CS!6
  Top 0.229: DS7.4 9.38,90.19 9.91,89.66 10.54,89.66 10.67,89.53 U21.5
!CS!7
  Top 0.229: DS8.4 25.13,90.19 25.65,89.66 26.29,89.66 26.42,89.53 U24.5
!CS!8
  Top 0.229: DS9.4 40.87,90.19 41.4,89.66 42.04,89.66 42.16,89.53 U27.5
!CS!9
  Top 0.229: DS10.4 56.62,90.19 57.15,89.66 57.78,89.66 57.91,89.53 U30.5
!CS!10
  Top 0.229: DS11.4 72.37,90.19 72.9,89.66 73.53,89.66 73.66,89.53 U33.5
!CS!_HIGH  (via drill 0.38)
  Top 0.254: v10.67,20.57 U3.10
  Bottom 0.254: J2.1 10.67,13.59 v10.67,20.57
!CS!_HIGH1  (via drill 0.38)
  Top 0.254: v26.42,20.57 U6.10
  Bottom 0.254: J1.1 26.42,13.59 v26.42,20.57
!CS!_HIGH2  (via drill 0.38)
  Top 0.254: v42.16,20.57 U9.10
  Bottom 0.254: J3.1 42.16,13.59 v42.16,20.57
!CS!_HIGH3  (via drill 0.38)
  Top 0.254: v57.91,20.57 U12.10
  Bottom 0.254: J4.1 57.91,13.59 v57.91,20.57
!CS!_HIGH4  (via drill 0.38)
  Top 0.254: v73.66,20.57 U15.10
  Bottom 0.254: J5.1 73.66,13.59 v73.66,20.57
!CS!_HIGH6  (via drill 0.38)
  Top 0.254: v10.67,84.58 U21.10
  Bottom 0.254: J7.1 10.67,77.6 v10.67,84.58
!CS!_HIGH7  (via drill 0.38)
  Top 0.254: v26.42,84.58 U24.10
  Bottom 0.254: J8.1 26.42,77.6 v26.42,84.58
!CS!_HIGH8  (via drill 0.38)
  Top 0.254: v42.16,84.58 U27.10
  Bottom 0.254: J9.1 42.16,77.6 v42.16,84.58
!CS!_HIGH9  (via drill 0.38)
  Top 0.254: v57.91,84.58 U30.10
  Bottom 0.254: J10.1 57.91,77.6 v57.91,84.58
!CS!_HIGH10  (via drill 0.38)
  Top 0.254: v73.66,84.58 U33.10
  Bottom 0.254: J11.1 73.66,77.6 v73.66,84.58
!RES!  (via drill 0.38)
  Top 0.229: DS1.5 v9.68,28.7 | v13.21,25.96 U3.3
  Bottom 0.229: v9.68,28.7 10.44,27.94 12.32,27.94 13.21,27.05 v13.21,25.96
!RES!1  (via drill 0.38)
  Top 0.229: DS2.5 v25.43,28.7 | v28.96,25.96 U6.3
  Bottom 0.229: v25.43,28.7 26.19,27.94 28.07,27.94 28.96,27.05 v28.96,25.96
!RES!2  (via drill 0.38)
  Top 0.229: DS3.5 v41.17,28.7 | v44.7,25.96 U9.3
  Bottom 0.229: v41.17,28.7 41.94,27.94 43.81,27.94 44.7,27.05 v44.7,25.96
!RES!3  (via drill 0.38)
  Top 0.229: DS4.5 v56.92,28.7 | v60.45,25.96 U12.3
  Bottom 0.229: v56.92,28.7 57.68,27.94 59.56,27.94 60.45,27.05 v60.45,25.96
!RES!4  (via drill 0.38)
  Top 0.229: DS5.5 v72.67,28.7 | v76.2,25.96 U15.3
  Bottom 0.229: v72.67,28.7 73.43,27.94 75.31,27.94 76.2,27.05 v76.2,25.96
!RES!6  (via drill 0.38)
  Top 0.229: DS7.5 v9.68,92.71 | v13.21,89.97 U21.3
  Bottom 0.229: v9.68,92.71 10.44,91.95 12.32,91.95 13.21,91.06 v13.21,89.97
!RES!7  (via drill 0.38)
  Top 0.229: DS8.5 v25.43,92.71 | v28.96,89.97 U24.3
  Bottom 0.229: v25.43,92.71 26.19,91.95 28.07,91.95 28.96,91.06 v28.96,89.97
!RES!8  (via drill 0.38)
  Top 0.229: DS9.5 v41.17,92.71 | v44.7,89.97 U27.3
  Bottom 0.229: v41.17,92.71 41.94,91.95 43.81,91.95 44.7,91.06 v44.7,89.97
!RES!9  (via drill 0.38)
  Top 0.229: DS10.5 v56.92,92.71 | v60.45,89.97 U30.3
  Bottom 0.229: v56.92,92.71 57.68,91.95 59.56,91.95 60.45,91.06 v60.45,89.97
!RES!10  (via drill 0.38)
  Top 0.229: DS11.5 v72.67,92.71 | v76.2,89.97 U33.3
  Bottom 0.229: v72.67,92.71 73.43,91.95 75.31,91.95 76.2,91.06 v76.2,89.97
!RES!_HIGH  (via drill 0.38)
  Top 0.254: v13.21,20.57 U3.12
  Bottom 0.254: J2.4 15.75,20.83 15.11,21.46 13.72,21.46 13.21,20.95 v13.21,20.57
!RES!_HIGH1  (via drill 0.38)
  Top 0.254: v28.96,20.57 U6.12
  Bottom 0.254: J1.4 31.5,20.83 30.86,21.46 29.46,21.46 28.96,20.95 v28.96,20.57
!RES!_HIGH2  (via drill 0.38)
  Top 0.254: v44.7,20.57 U9.12
  Bottom 0.254: J3.4 47.24,20.83 46.61,21.46 45.21,21.46 44.7,20.95 v44.7,20.57
!RES!_HIGH3  (via drill 0.38)
  Top 0.254: v60.45,20.57 U12.12
  Bottom 0.254: J4.4 62.99,20.83 62.36,21.46 60.96,21.46 60.45,20.95 v60.45,20.57
!RES!_HIGH4  (via drill 0.38)
  Top 0.254: v76.2,20.57 U15.12
  Bottom 0.254: J5.4 78.74,20.83 78.11,21.46 76.71,21.46 76.2,20.95 v76.2,20.57
!RES!_HIGH6  (via drill 0.38)
  Top 0.254: v13.21,84.58 U21.12
  Bottom 0.254: J7.4 15.75,84.84 15.11,85.47 13.72,85.47 13.21,84.96 v13.21,84.58
!RES!_HIGH7  (via drill 0.38)
  Top 0.254: v28.96,84.58 U24.12
  Bottom 0.254: J8.4 31.5,84.84 30.86,85.47 29.46,85.47 28.96,84.96 v28.96,84.58
!RES!_HIGH8  (via drill 0.38)
  Top 0.254: v44.7,84.58 U27.12
  Bottom 0.254: J9.4 47.24,84.84 46.61,85.47 45.21,85.47 44.7,84.96 v44.7,84.58
!RES!_HIGH9  (via drill 0.38)
  Top 0.254: v60.45,84.58 U30.12
  Bottom 0.254: J10.4 62.99,84.84 62.36,85.47 60.96,85.47 60.45,84.96 v60.45,84.58
!RES!_HIGH10  (via drill 0.38)
  Top 0.254: v76.2,84.58 U33.12
  Bottom 0.254: J11.4 78.74,84.84 78.11,85.47 76.71,85.47 76.2,84.96 v76.2,84.58
GND  (via drill 0.38)
  other vias: 13.72,30.86 16.89,20.83 19.3,17.4 9.52,27.69 20.45,30.73 17.53,36.32 18.29,39.12 16.64,43.56 9.65,15.37 17.27,23.75 20.83,42.42 10.16,30.48 8.38,23.24
  pour Top (isolate 0.254): 22.1,73.28 6.86,73.28 6.86,9.78 22.1,9.78
  pour Bottom (isolate 0.254): 6.86,73.28 22.1,73.28 22.1,9.78 6.86,9.78
GND1  (via drill 0.38)
  other vias: 29.46,30.86 32.64,20.83 35.05,17.4 25.27,27.69 36.2,30.73 33.27,36.32 34.04,39.12 32.38,43.56 25.4,15.37 33.02,23.75 36.58,42.42 25.91,30.48 24.13,23.24
  pour Top (isolate 0.254): 37.85,73.28 22.61,73.28 22.61,9.78 37.85,9.78
  pour Bottom (isolate 0.254): 22.61,73.28 37.85,73.28 37.85,9.78 22.61,9.78
GND2  (via drill 0.38)
  other vias: 45.21,30.86 48.39,20.83 50.8,17.4 41.02,27.69 51.94,30.73 49.02,36.32 49.78,39.12 48.13,43.56 41.15,15.37 48.77,23.75 52.32,42.42 41.66,30.48 39.88,23.24
  pour Top (isolate 0.254): 53.59,73.28 38.35,73.28 38.35,9.78 53.59,9.78
  pour Bottom (isolate 0.254): 38.35,73.28 53.59,73.28 53.59,9.78 38.35,9.78
GND3  (via drill 0.38)
  other vias: 60.96,30.86 64.14,20.83 66.55,17.4 56.77,27.69 67.69,30.73 64.77,36.32 65.53,39.12 63.88,43.56 56.9,15.37 64.52,23.75 68.07,42.42 57.4,30.48 55.63,23.24
  pour Top (isolate 0.254): 69.34,73.28 54.1,73.28 54.1,9.78 69.34,9.78
  pour Bottom (isolate 0.254): 54.1,73.28 69.34,73.28 69.34,9.78 54.1,9.78
GND4  (via drill 0.38)
  other vias: 76.71,30.86 79.88,20.83 82.3,17.4 72.52,27.69 83.44,30.73 80.52,36.32 81.28,39.12 79.63,43.56 72.64,15.37 80.26,23.75 83.82,42.42 73.15,30.48 71.37,23.24
  pour Top (isolate 0.254): 85.09,73.28 69.85,73.28 69.85,9.78 85.09,9.78
  pour Bottom (isolate 0.254): 69.85,73.28 85.09,73.28 85.09,9.78 69.85,9.78
GND6  (via drill 0.38)
  other vias: 13.72,94.87 16.89,84.84 19.3,81.41 9.52,91.69 20.45,94.74 17.53,100.33 18.29,103.12 16.64,107.57 9.65,79.38 17.27,87.76 20.83,106.43 10.16,94.49 8.38,87.25
  pour Top (isolate 0.254): 22.1,137.29 6.86,137.29 6.86,73.79 22.1,73.79
  pour Bottom (isolate 0.254): 6.86,137.29 22.1,137.29 22.1,73.79 6.86,73.79
GND7  (via drill 0.38)
  other vias: 29.46,94.87 32.64,84.84 35.05,81.41 25.27,91.69 36.2,94.74 33.27,100.33 34.04,103.12 32.38,107.57 25.4,79.38 33.02,87.76 36.58,106.43 25.91,94.49 24.13,87.25
  pour Top (isolate 0.254): 37.85,137.29 22.61,137.29 22.61,73.79 37.85,73.79
  pour Bottom (isolate 0.254): 22.61,137.29 37.85,137.29 37.85,73.79 22.61,73.79
GND8  (via drill 0.38)
  other vias: 45.21,94.87 48.39,84.84 50.8,81.41 41.02,91.69 51.94,94.74 49.02,100.33 49.78,103.12 48.13,107.57 41.15,79.38 48.77,87.76 52.32,106.43 41.66,94.49 39.88,87.25
  pour Top (isolate 0.254): 53.59,137.29 38.35,137.29 38.35,73.79 53.59,73.79
  pour Bottom (isolate 0.254): 38.35,137.29 53.59,137.29 53.59,73.79 38.35,73.79
GND9  (via drill 0.38)
  other vias: 60.96,94.87 64.14,84.84 66.55,81.41 56.77,91.69 67.69,94.74 64.77,100.33 65.53,103.12 63.88,107.57 56.9,79.38 64.52,87.76 68.07,106.43 57.4,94.49 55.63,87.25
  pour Top (isolate 0.254): 69.34,137.29 54.1,137.29 54.1,73.79 69.34,73.79
  pour Bottom (isolate 0.254): 54.1,137.29 69.34,137.29 69.34,73.79 54.1,73.79
GND10  (via drill 0.38)
  other vias: 76.71,94.87 79.88,84.84 82.3,81.41 72.52,91.69 83.44,94.74 80.52,100.33 81.28,103.12 79.63,107.57 72.64,79.38 80.26,87.76 83.82,106.43 73.15,94.49 71.37,87.25
  pour Top (isolate 0.254): 85.09,137.29 69.85,137.29 69.85,73.79 85.09,73.79
  pour Bottom (isolate 0.254): 69.85,137.29 85.09,137.29 85.09,73.79 69.85,73.79
N$1
  Top 0.229: DS1.12 11.78,27.4 12.31,27.93 C7.2
N$2
  Top 0.254: U1.1 16.51,37.69 | 16.51,37.69 14.68,37.69 L1.P$2 | D1.A 16.51,35.82 16.51,37.69
N$3
  Top 0.254: R1.1 20.83,38.35 | 20.83,38.35 R2.2 | U1.3 19.9,38.35 20.83,38.35
N$4
  Top 0.254: U4.1 32.26,37.69 | 32.26,37.69 30.43,37.69 L2.P$2 | D2.A 32.26,35.82 32.26,37.69
N$5
  Top 0.254: R3.1 36.58,38.35 | 36.58,38.35 R4.2 | U4.3 35.65,38.35 36.58,38.35
N$6
  Top 0.229: DS2.12 27.53,27.4 28.06,27.93 C18.2
N$7
  Top 0.254: U7.1 48.01,37.69 | 48.01,37.69 46.17,37.69 L3.P$2 | D3.A 48.01,35.82 48.01,37.69
N$8
  Top 0.254: R5.1 52.32,38.35 | 52.32,38.35 R6.2 | U7.3 51.4,38.35 52.32,38.35
N$9
  Top 0.229: DS3.12 43.27,27.4 43.8,27.93 C29.2
N$10
  Top 0.254: U10.1 63.75,37.69 | 63.75,37.69 61.92,37.69 L4.P$2 | D4.A 63.75,35.82 63.75,37.69
N$11
  Top 0.254: R7.1 68.07,38.35 | 68.07,38.35 R8.2 | U10.3 67.15,38.35 68.07,38.35
N$12
  Top 0.229: DS4.12 59.02,27.4 59.55,27.93 C40.2
N$13
  Top 0.254: U13.1 79.5,37.69 | 79.5,37.69 77.67,37.69 L5.P$2 | D5.A 79.5,35.82 79.5,37.69
N$14
  Top 0.254: R9.1 83.82,38.35 | 83.82,38.35 R10.2 | U13.3 82.9,38.35 83.82,38.35
N$15
  Top 0.229: DS5.12 74.77,27.4 75.3,27.93 C51.2
N$19
  Top 0.254: U19.1 16.51,101.7 | 16.51,101.7 14.68,101.7 L7.P$2 | D7.A 16.51,99.83 16.51,101.7
N$20
  Top 0.254: R13.1 20.83,102.36 | 20.83,102.36 R14.2 | U19.3 19.9,102.36 20.83,102.36
N$21
  Top 0.229: DS7.12 11.78,91.41 12.31,91.94 C73.2
N$22
  Top 0.254: U22.1 32.26,101.7 | 32.26,101.7 30.43,101.7 L8.P$2 | D8.A 32.26,99.83 32.26,101.7
N$23
  Top 0.254: R15.1 36.58,102.36 | 36.58,102.36 R16.2 | U22.3 35.65,102.36 36.58,102.36
N$24
  Top 0.229: DS8.12 27.53,91.41 28.06,91.94 C84.2
N$25
  Top 0.254: U25.1 48.01,101.7 | 48.01,101.7 46.17,101.7 L9.P$2 | D9.A 48.01,99.83 48.01,101.7
N$26
  Top 0.254: R17.1 52.32,102.36 | 52.32,102.36 R18.2 | U25.3 51.4,102.36 52.32,102.36
N$27
  Top 0.229: DS9.12 43.27,91.41 43.8,91.94 C95.2
N$28
  Top 0.254: U28.1 63.75,101.7 | 63.75,101.7 61.92,101.7 L10.P$2 | D10.A 63.75,99.83 63.75,101.7
N$29
  Top 0.254: R19.1 68.07,102.36 | 68.07,102.36 R20.2 | U28.3 67.15,102.36 68.07,102.36
N$30
  Top 0.229: DS10.12 59.02,91.41 59.55,91.94 C106.2
N$31
  Top 0.254: U31.1 79.5,101.7 | 79.5,101.7 77.67,101.7 L11.P$2 | D11.A 79.5,99.83 79.5,101.7
N$32
  Top 0.254: R21.1 83.82,102.36 | 83.82,102.36 R22.2 | U31.3 82.9,102.36 83.82,102.36
N$33
  Top 0.229: DS11.12 74.77,91.41 75.3,91.94 C117.2
SCLK
  Top 0.229: DS1.6 9.98,26.34 10.16,26.16 11.56,26.16 11.94,25.78 U3.4
SCLK1
  Top 0.229: DS2.6 25.73,26.34 25.91,26.16 27.3,26.16 27.69,25.78 U6.4
SCLK2
  Top 0.229: DS3.6 41.47,26.34 41.66,26.16 43.05,26.16 43.43,25.78 U9.4
SCLK3
  Top 0.229: DS4.6 57.22,26.34 57.4,26.16 58.8,26.16 59.18,25.78 U12.4
SCLK4
  Top 0.229: DS5.6 72.97,26.34 73.15,26.16 74.55,26.16 74.93,25.78 U15.4
SCLK6
  Top 0.229: DS7.6 9.98,90.35 10.16,90.17 11.56,90.17 11.94,89.79 U21.4
SCLK7
  Top 0.229: DS8.6 25.73,90.35 25.91,90.17 27.3,90.17 27.69,89.79 U24.4
SCLK8
  Top 0.229: DS9.6 41.47,90.35 41.66,90.17 43.05,90.17 43.43,89.79 U27.4
SCLK9
  Top 0.229: DS10.6 57.22,90.35 57.4,90.17 58.8,90.17 59.18,89.79 U30.4
SCLK10
  Top 0.229: DS11.6 72.97,90.35 73.15,90.17 74.55,90.17 74.93,89.79 U33.4
SCLK_HIGH  (via drill 0.38)
  Top 0.254: v11.94,20.57 U3.11
  Bottom 0.254: J2.2 11.94,12.32 v11.94,20.57
SCLK_HIGH1  (via drill 0.38)
  Top 0.254: v27.69,20.57 U6.11
  Bottom 0.254: J1.2 27.69,12.32 v27.69,20.57
SCLK_HIGH2  (via drill 0.38)
  Top 0.254: v43.43,20.57 U9.11
  Bottom 0.254: J3.2 43.43,12.32 v43.43,20.57
SCLK_HIGH3  (via drill 0.38)
  Top 0.254: v59.18,20.57 U12.11
  Bottom 0.254: J4.2 59.18,12.32 v59.18,20.57
SCLK_HIGH4  (via drill 0.38)
  Top 0.254: v74.93,20.57 U15.11
  Bottom 0.254: J5.2 74.93,12.32 v74.93,20.57
SCLK_HIGH6  (via drill 0.38)
  Top 0.254: v11.94,84.58 U21.11
  Bottom 0.254: J7.2 11.94,76.33 v11.94,84.58
SCLK_HIGH7  (via drill 0.38)
  Top 0.254: v27.69,84.58 U24.11
  Bottom 0.254: J8.2 27.69,76.33 v27.69,84.58
SCLK_HIGH8  (via drill 0.38)
  Top 0.254: v43.43,84.58 U27.11
  Bottom 0.254: J9.2 43.43,76.33 v43.43,84.58
SCLK_HIGH9  (via drill 0.38)
  Top 0.254: v59.18,84.58 U30.11
  Bottom 0.254: J10.2 59.18,76.33 v59.18,84.58
SCLK_HIGH10  (via drill 0.38)
  Top 0.254: v74.93,84.58 U33.11
  Bottom 0.254: J11.2 74.93,76.33 v74.93,84.58
SDIN  (via drill 0.38)
  Top 0.229: DS1.7 10.28,29.14 v10.74,28.68 | v14.48,25.96 U3.2
  Bottom 0.229: v14.48,25.96 14.48,26.67 12.47,28.68 v10.74,28.68
SDIN1  (via drill 0.38)
  Top 0.229: DS2.7 26.03,29.14 v26.49,28.68 | v30.23,25.96 U6.2
  Bottom 0.229: v30.23,25.96 30.23,26.67 28.22,28.68 v26.49,28.68
SDIN2  (via drill 0.38)
  Top 0.229: DS3.7 41.77,29.14 v42.24,28.68 | v45.97,25.96 U9.2
  Bottom 0.229: v45.97,25.96 45.97,26.67 43.97,28.68 v42.24,28.68
SDIN3  (via drill 0.38)
  Top 0.229: DS4.7 57.52,29.14 v57.99,28.68 | v61.72,25.96 U12.2
  Bottom 0.229: v61.72,25.96 61.72,26.67 59.71,28.68 v57.99,28.68
SDIN4  (via drill 0.38)
  Top 0.229: DS5.7 73.27,29.14 v73.74,28.68 | v77.47,25.96 U15.2
  Bottom 0.229: v77.47,25.96 77.47,26.67 75.46,28.68 v73.74,28.68
SDIN6  (via drill 0.38)
  Top 0.229: DS7.7 10.28,93.15 v10.74,92.69 | v14.48,89.97 U21.2
  Bottom 0.229: v14.48,89.97 14.48,90.68 12.47,92.69 v10.74,92.69
SDIN7  (via drill 0.38)
  Top 0.229: DS8.7 26.03,93.15 v26.49,92.69 | v30.23,89.97 U24.2
  Bottom 0.229: v30.23,89.97 30.23,90.68 28.22,92.69 v26.49,92.69
SDIN8  (via drill 0.38)
  Top 0.229: DS9.7 41.77,93.15 v42.24,92.69 | v45.97,89.97 U27.2
  Bottom 0.229: v45.97,89.97 45.97,90.68 43.97,92.69 v42.24,92.69
SDIN9  (via drill 0.38)
  Top 0.229: DS10.7 57.52,93.15 v57.99,92.69 | v61.72,89.97 U30.2
  Bottom 0.229: v61.72,89.97 61.72,90.68 59.71,92.69 v57.99,92.69
SDIN10  (via drill 0.38)
  Top 0.229: DS11.7 73.27,93.15 v73.74,92.69 | v77.47,89.97 U33.2
  Bottom 0.229: v77.47,89.97 77.47,90.68 75.46,92.69 v73.74,92.69
SDIN_HIGH  (via drill 0.38)
  Top 0.254: v14.48,20.57 U3.13
  Bottom 0.254: J2.3 14.48,12.32 v14.48,20.57
SDIN_HIGH1  (via drill 0.38)
  Top 0.254: v30.23,20.57 U6.13
  Bottom 0.254: J1.3 30.23,12.32 v30.23,20.57
SDIN_HIGH2  (via drill 0.38)
  Top 0.254: v45.97,20.57 U9.13
  Bottom 0.254: J3.3 45.97,12.32 v45.97,20.57
SDIN_HIGH3  (via drill 0.38)
  Top 0.254: v61.72,20.57 U12.13
  Bottom 0.254: J4.3 61.72,12.32 v61.72,20.57
SDIN_HIGH4  (via drill 0.38)
  Top 0.254: v77.47,20.57 U15.13
  Bottom 0.254: J5.3 77.47,12.32 v77.47,20.57
SDIN_HIGH6  (via drill 0.38)
  Top 0.254: v14.48,84.58 U21.13
  Bottom 0.254: J7.3 14.48,76.33 v14.48,84.58
SDIN_HIGH7  (via drill 0.38)
  Top 0.254: v30.23,84.58 U24.13
  Bottom 0.254: J8.3 30.23,76.33 v30.23,84.58
SDIN_HIGH8  (via drill 0.38)
  Top 0.254: v45.97,84.58 U27.13
  Bottom 0.254: J9.3 45.97,76.33 v45.97,84.58
SDIN_HIGH9  (via drill 0.38)
  Top 0.254: v61.72,84.58 U30.13
  Bottom 0.254: J10.3 61.72,76.33 v61.72,84.58
SDIN_HIGH10  (via drill 0.38)
  Top 0.254: v77.47,84.58 U33.13
  Bottom 0.254: J11.3 77.47,76.33 v77.47,84.58
VIN  (via drill 0.38)
  Top 0.254: 19.56,20.26 19.56,19.52 C8.1 20.83,18.25 J2.6 | 19.56,20.26 v19.56,21.21 19.56,21.97 19.37,22.16 U2.1 | 19.56,20.26 U2.3 17.85,20.26 16.63,19.04 U3.14 15.75,17.61 C11.1 | v19.14,44.07 C1.1 19.14,41.4 | 19.14,41.4 19.14,40.29 U1.4 | 19.14,41.4 17.34,41.4 | L1.P$1 15.45,40.09 16.76,41.4 17.34,41.4 | U1.5 17.34,41.4
  Bottom 0.254: v19.56,21.21 19.56,43.65 v19.14,44.07
VIN1  (via drill 0.38)
  Top 0.254: 35.31,20.26 35.31,19.52 C19.1 36.58,18.25 J1.6 | 35.31,20.26 v35.31,21.21 35.31,21.97 35.12,22.16 U5.1 | 35.31,20.26 U5.3 33.59,20.26 32.38,19.04 U6.14 31.5,17.61 C22.1 | v34.89,44.07 C12.1 34.89,41.4 | 34.89,41.4 34.89,40.29 U4.4 | 34.89,41.4 33.09,41.4 | L2.P$1 31.2,40.09 32.51,41.4 33.09,41.4 | U4.5 33.09,41.4
  Bottom 0.254: v35.31,21.21 35.31,43.65 v34.89,44.07
VIN2  (via drill 0.38)
  Top 0.254: 51.05,20.26 51.05,19.52 C30.1 52.32,18.25 J3.6 | 51.05,20.26 v51.05,21.21 51.05,21.97 50.87,22.16 U8.1 | 51.05,20.26 U8.3 49.34,20.26 48.13,19.04 U9.14 47.24,17.61 C33.1 | v50.63,44.07 C23.1 50.63,41.4 | 50.63,41.4 50.63,40.29 U7.4 | 50.63,41.4 48.83,41.4 | L3.P$1 46.95,40.09 48.26,41.4 48.83,41.4 | U7.5 48.83,41.4
  Bottom 0.254: v51.05,21.21 51.05,43.65 v50.63,44.07
VIN3  (via drill 0.38)
  Top 0.254: 66.8,20.26 66.8,19.52 C41.1 68.07,18.25 J4.6 | 66.8,20.26 v66.8,21.21 66.8,21.97 66.61,22.16 U11.1 | 66.8,20.26 U11.3 65.09,20.26 63.88,19.04 U12.14 62.99,17.61 C44.1 | v66.38,44.07 C34.1 66.38,41.4 | 66.38,41.4 66.38,40.29 U10.4 | 66.38,41.4 64.58,41.4 | L4.P$1 62.7,40.09 64.01,41.4 64.58,41.4 | U10.5 64.58,41.4
  Bottom 0.254: v66.8,21.21 66.8,43.65 v66.38,44.07
VIN4  (via drill 0.38)
  Top 0.254: 82.55,20.26 82.55,19.52 C52.1 83.82,18.25 J5.6 | 82.55,20.26 v82.55,21.21 82.55,21.97 82.36,22.16 U14.1 | 82.55,20.26 U14.3 80.84,20.26 79.62,19.04 U15.14 78.74,17.61 C55.1 | v82.13,44.07 C45.1 82.13,41.4 | 82.13,41.4 82.13,40.29 U13.4 | 82.13,41.4 80.33,41.4 | L5.P$1 78.44,40.09 79.76,41.4 80.33,41.4 | U13.5 80.33,41.4
  Bottom 0.254: v82.55,21.21 82.55,43.65 v82.13,44.07
VIN6  (via drill 0.38)
  Top 0.254: 19.56,84.27 19.56,83.53 C74.1 20.83,82.26 J7.6 | 19.56,84.27 v19.56,85.22 19.56,85.98 19.37,86.17 U20.1 | 19.56,84.27 U20.3 17.85,84.27 16.63,83.05 U21.14 15.75,81.62 C77.1 | v19.14,108.08 C67.1 19.14,105.41 | 19.14,105.41 19.14,104.3 U19.4 | 19.14,105.41 17.34,105.41 | L7.P$1 15.45,104.1 16.76,105.41 17.34,105.41 | U19.5 17.34,105.41
  Bottom 0.254: v19.56,85.22 19.56,107.66 v19.14,108.08
VIN7  (via drill 0.38)
  Top 0.254: 35.31,84.27 35.31,83.53 C85.1 36.58,82.26 J8.6 | 35.31,84.27 v35.31,85.22 35.31,85.98 35.12,86.17 U23.1 | 35.31,84.27 U23.3 33.59,84.27 32.38,83.05 U24.14 31.5,81.62 C88.1 | v34.89,108.08 C78.1 34.89,105.41 | 34.89,105.41 34.89,104.3 U22.4 | 34.89,105.41 33.09,105.41 | L8.P$1 31.2,104.1 32.51,105.41 33.09,105.41 | U22.5 33.09,105.41
  Bottom 0.254: v35.31,85.22 35.31,107.66 v34.89,108.08
VIN8  (via drill 0.38)
  Top 0.254: 51.05,84.27 51.05,83.53 C96.1 52.32,82.26 J9.6 | 51.05,84.27 v51.05,85.22 51.05,85.98 50.87,86.17 U26.1 | 51.05,84.27 U26.3 49.34,84.27 48.13,83.05 U27.14 47.24,81.62 C99.1 | v50.63,108.08 C89.1 50.63,105.41 | 50.63,105.41 50.63,104.3 U25.4 | 50.63,105.41 48.83,105.41 | L9.P$1 46.95,104.1 48.26,105.41 48.83,105.41 | U25.5 48.83,105.41
  Bottom 0.254: v51.05,85.22 51.05,107.66 v50.63,108.08
VIN9  (via drill 0.38)
  Top 0.254: 66.8,84.27 66.8,83.53 C107.1 68.07,82.26 J10.6 | 66.8,84.27 v66.8,85.22 66.8,85.98 66.61,86.17 U29.1 | 66.8,84.27 U29.3 65.09,84.27 63.88,83.05 U30.14 62.99,81.62 C110.1 | v66.38,108.08 C100.1 66.38,105.41 | 66.38,105.41 66.38,104.3 U28.4 | 66.38,105.41 64.58,105.41 | L10.P$1 62.7,104.1 64.01,105.41 64.58,105.41 | U28.5 64.58,105.41
  Bottom 0.254: v66.8,85.22 66.8,107.66 v66.38,108.08
VIN10  (via drill 0.38)
  Top 0.254: 82.55,84.27 82.55,83.53 C118.1 83.82,82.26 J11.6 | 82.55,84.27 v82.55,85.22 82.55,85.98 82.36,86.17 U32.1 | 82.55,84.27 U32.3 80.84,84.27 79.62,83.05 U33.14 78.74,81.62 C121.1 | v82.13,108.08 C111.1 82.13,105.41 | 82.13,105.41 82.13,104.3 U31.4 | 82.13,105.41 80.33,105.41 | L11.P$1 78.44,104.1 79.76,105.41 80.33,105.41 | U31.5 80.33,105.41
  Bottom 0.254: v82.55,85.22 82.55,107.66 v82.13,108.08

## Text on the board
Dimension: vscore | vscore | vscore | vscore | vscore
tPlace: 1.81" Greyscale / OLED Breakout | 1.81" Greyscale / OLED Breakout | 1.81" Greyscale / OLED Breakout | 1.81" Greyscale / OLED Breakout | 1.81" Greyscale / OLED Breakout | !CS! | SCLK | SDIN | !RES! | GND | 3.3-5V | !CS! | SCLK | SDIN | !RES! | GND | 3.3-5V | !CS! | SCLK | SDIN | !RES! | GND | 3.3-5V | !CS! | SCLK | SDIN | !RES! | GND | 3.3-5V | !CS! | SCLK | SDIN | !RES! | GND | 3.3-5V | 1.81" Greyscale / OLED Breakout | 1.81" Greyscale / OLED Breakout | 1.81" Greyscale / OLED Breakout | 1.81" Greyscale / OLED Breakout | 1.81" Greyscale / OLED Breakout | !CS! | SCLK | SDIN | !RES! | GND | 3.3-5V | !CS! | SCLK | SDIN | !RES! | GND | 3.3-5V | !CS! | SCLK | SDIN | !RES! | GND | 3.3-5V | !CS! | SCLK | SDIN | !RES! | GND | 3.3-5V | !CS! | SCLK | SDIN | !RES! | GND | 3.3-5V
bPlace: 1.81" Greyscale OLED Breakout | 1.81" Greyscale OLED Breakout | 1.81" Greyscale OLED Breakout | 1.81" Greyscale OLED Breakout | 1.81" Greyscale OLED Breakout | !CS! | SCLK | SDIN | !RES! | GND | 3.3-5V | !CS! | SCLK | SDIN | !RES! | GND | 3.3-5V | !CS! | SCLK | SDIN | !RES! | GND | 3.3-5V | !CS! | SCLK | SDIN | !RES! | GND | 3.3-5V | !CS! | SCLK | SDIN | !RES! | GND | 3.3-5V | 1.81" Greyscale OLED Breakout | 1.81" Greyscale OLED Breakout | 1.81" Greyscale OLED Breakout | 1.81" Greyscale OLED Breakout | 1.81" Greyscale OLED Breakout | !CS! | SCLK | SDIN | !RES! | GND | 3.3-5V | !CS! | SCLK | SDIN | !RES! | GND | 3.3-5V | !CS! | SCLK | SDIN | !RES! | GND | 3.3-5V | !CS! | SCLK | SDIN | !RES! | GND | 3.3-5V | !CS! | SCLK | SDIN | !RES! | GND | 3.3-5V